# Altium PCB EECS498Converter.PcbDoc
Units mil, origin at the board's own origin, x right, y up, seen from the top; angles counter-clockwise.
Board outline 8000 x 5500 mil, 2 copper layers (Top Layer, Bottom Layer); 143 components, 79 nets, 280 pads, 0 vias.
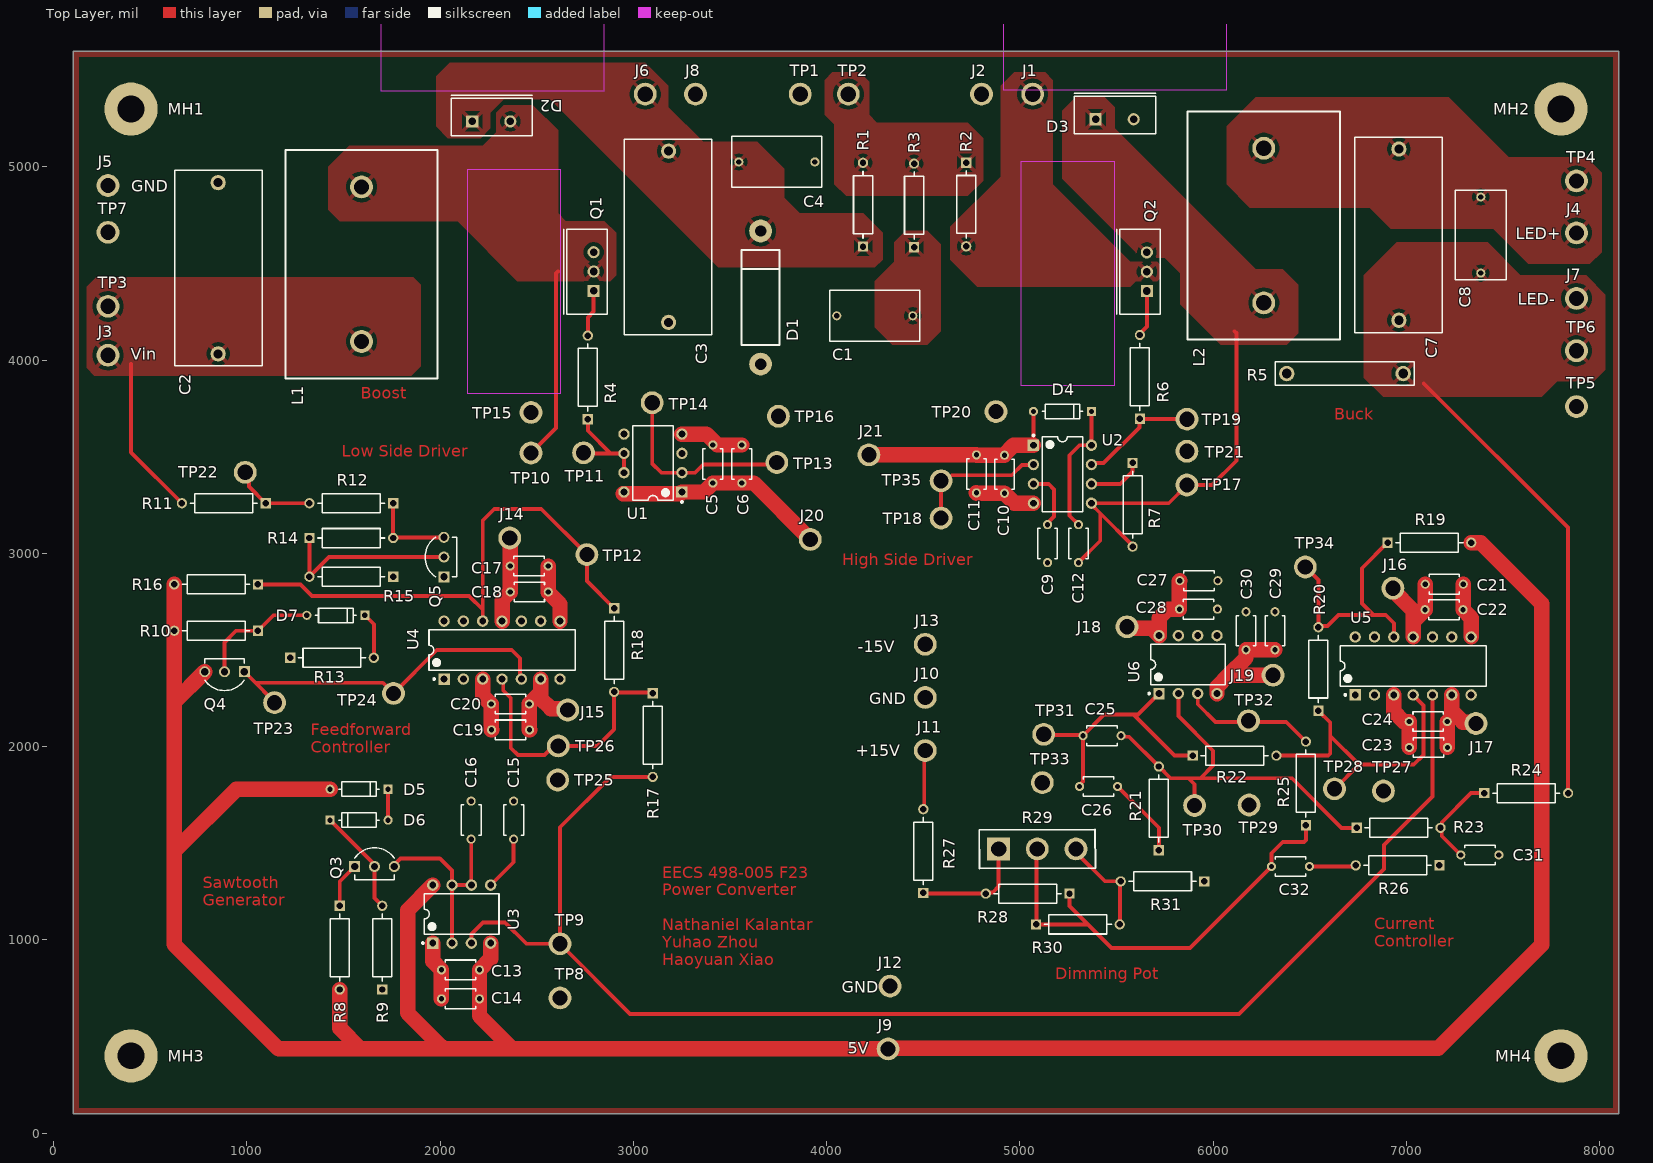
[diagram p0: Top Layer view]
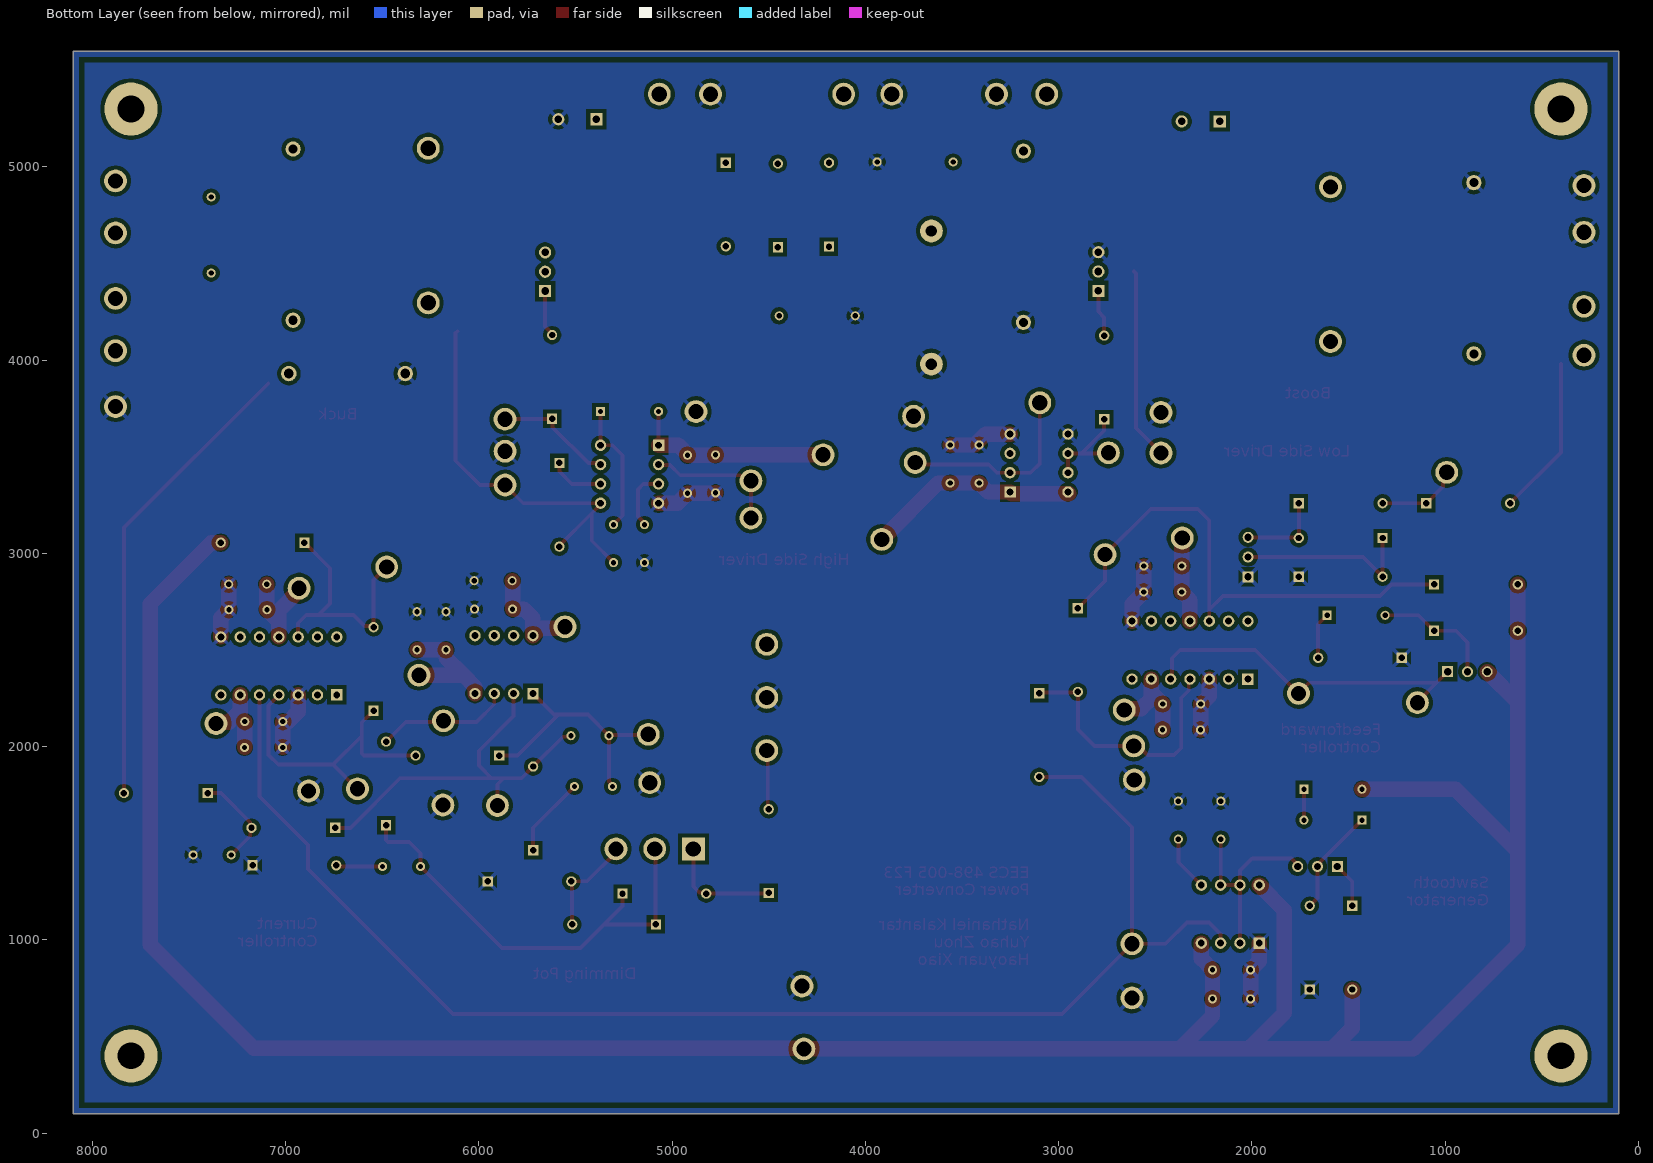
[diagram p1: Bottom Layer view, seen from below]
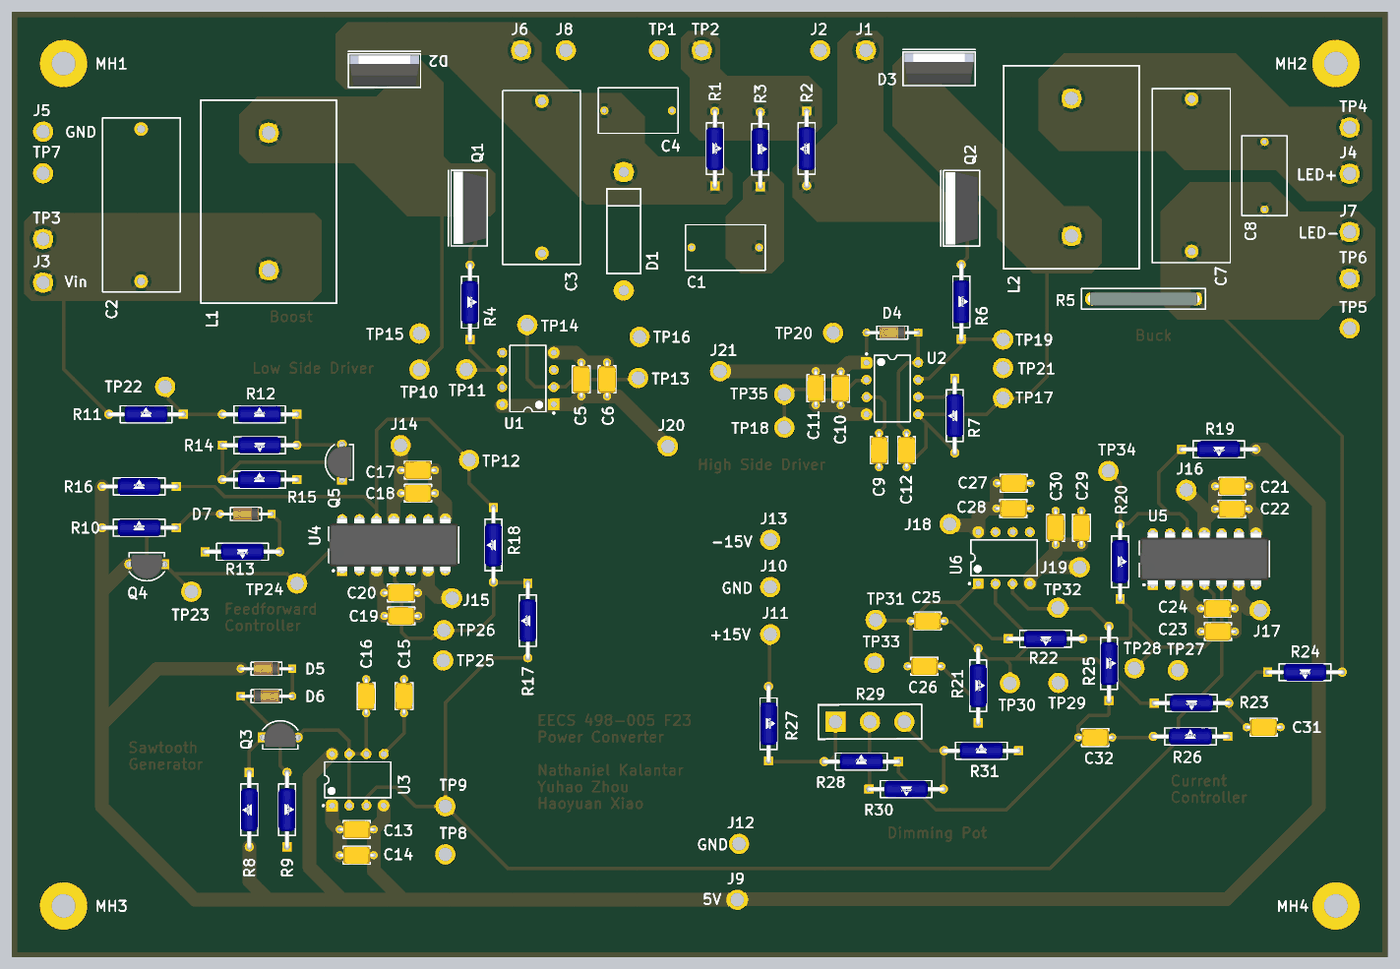
[diagram p2: 3D render of the assembled board from above, using the file's embedded part models]

## Layer stack, top to bottom
Top Layer: signal copper 1.4
Dielectric 1: dielectric 12.6, FR-4, Dk 4.8
Bottom Layer: signal copper 1.4

## Board outline
100,5600 8100,5600 8100,100 100,100

## Design rules (kind name [scope] priority, off if disabled: settings)
Clearance [All] p1: gap=10 ignorepadtopadclearanceinfootprint=FALSE except(0: Arc-Hole Track-Hole SMDPad-Hole THPad-Hole Via-Hole Fill-Hole Poly-Hole Region-Hole Text-Hole; 20: THPad-Poly)
Height [All] p1: minheight=0 maxheight=1100 prefheight=500
HoleSize [All] p1: absolutevalues=TRUE maxlimit=300 minlimit=10 maxpercent=80.000 minpercent=20.000
HoleToHoleClearance [All] p1: gap=8 allowstackedmicrovias=TRUE
MinimumAnnularRing [All] p1: minimumring=5
MinimumSolderMaskSliver [All] p1: minsoldermaskwidth=0
PasteMaskExpansion [All] p1: expansion=-99999 usepaste=FALSE
PlaneConnect [All] p1: planeconnectstyle=Relief reliefexpansion=20 reliefentries=4 reliefconductorwidth=20 reliefairgap=2
PolygonConnect [All] p1: connectstyle=Relief reliefconductorwidth=20 reliefentries=4 polygonreliefangle="45 Angle" airgapwidth=20
RoutingVias [All] p1: holewidth=28 width=50 viastyle="Through Hole" minholewidth=28 minwidth=50 maxholewidth=28 maxwidth=50
SilkToSolderMaskClearance [IsPad] p1: minsilkscreentomaskgap=0 clearancetoexposedcopper=TRUE
SolderMaskExpansion [All] p1: expansion=4 istentingtop=FALSE
Width [All] p1: maxlimit=100 minlimit=5 preferedwidth=15
23 further rules are at their usual default settings.

## Classes and differential pairs
component class "Dimming Circuit": R27 R28 R29 R30 R31
component class "Feedforward Controller": C17 C18 C19 C20 D7 J14 J15 Q4 Q5 Q6 R10 R11 R12 R13 R14 R15 R16 R17 R18 TP22 TP23 TP24 TP25 TP26 U4
component class EECS498Converter: C1 D1 J1 J2 J3 J4 J5 J6 J7 J8 J9 J10 J11 J12 J13 MH1 MH2 MH3 MH4 R1 R2 R3 TP1 TP2 TP3 TP4 TP5 TP6 TP7 TP8 TP9
component class "Constant Current Controller": C21 C22 C23 C24 C25 C26 C27 C28 C29 C30 C31 C32 J16 J17 J18 J19 R19 R20 R21 R22 R23 R24 R25 R26 TP27 TP28 TP29 TP30 TP31 TP32 TP33 U5 U6
component class "Buck Converter": C7 C8 C9 C10 C11 C12 D3 D4 J21 L2 Q2 R5 R6 R7 TP17 TP18 TP19 TP20 TP21 TP34 TP35 U2
component class "Boost Converter": C2 C3 C4 C5 C6 D2 J20 L1 Q1 R4 TP10 TP11 TP12 TP13 TP14 TP15 TP16 U1
component class "PWM Generator": C13 C14 C15 C16 D5 D6 Q3 R8 R9 U3

## Components (designator, comment, footprint, x,y, rotation, side; value= is the part's Value field where it differs from the comment)
C1 "1uF Film" FP-FILM-CAP-10mm 4249,4230 r180 top
C2 "10uF Film" FP-FILM-CAP-22.5mm 851,4476 r90 top
C3 "10uF Film" FP-FILM-CAP-22.5mm 3182,4639 r270 top
C4 "1uF Film" FP-FILM-CAP-10mm 3742,5026 r0 top
C5 "10nF Ceramic" FP-K15H5-MFG 3411,3463 r90 top
C6 "0.1uF Ceramic" FP-K15H5-MFG 3561,3463 r90 top
C7 "10uF Film" FP-FILM-CAP-22.5mm 6961,4650 r270 top
C8 "1uF Film" FP-FILM-CAP-10mm 7385,4647.85 r270 top
C9 "0.1uF Ceramic" FP-K15H5-MFG 5143,3051 r270 top
C10 "10nF Ceramic" FP-K15H5-MFG 4920,3410 r270 top
C11 "0.1uF Ceramic" FP-K15H5-MFG 4775,3412 r270 top
C12 "0.1uF Ceramic" FP-K15H5-MFG 5303,3051 r270 top
C13 "10nF Ceramic" FP-K15H5-MFG 2105,845 r180 top
C14 "0.1uF Ceramic" FP-K15H5-MFG 2105,695 r180 top
C15 "10nF Ceramic" FP-K15H5-MFG 2380,1620 r90 top
C16 "10nF Ceramic" FP-K15H5-MFG 2160,1620 r90 top
C17 "0.1uF Ceramic" FP-K15H5-MFG 2460.57,2935 r0 top
C18 "10nF Ceramic" FP-K15H5-MFG 2461,2801 r0 top
C19 "0.1uF Ceramic" FP-K15H5-MFG 2364,2087 r0 top
C20 "10nF Ceramic" FP-K15H5-MFG 2363,2221 r180 top
C21 "0.1uF Ceramic" FP-K15H5-MFG 7196,2841 r0 top
C22 "10nF Ceramic" FP-K15H5-MFG 7195,2709 r0 top
C23 "0.1uF Ceramic" FP-K15H5-MFG 7114,1996 r180 top
C24 "10nF Ceramic" FP-K15H5-MFG 7113,2130 r180 top
C25 "10nF Ceramic" FP-K15H5-MFG 5425,2057 r0 top
C26 "10nF Ceramic" FP-K15H5-MFG 5407,1794 r0 top
C27 "0.1uF Ceramic" FP-K15H5-MFG 5926,2859 r0 top
C28 "10nF Ceramic" FP-K15H5-MFG 5924,2712 r0 top
C29 "0.1uF Ceramic" FP-K15H5-MFG 6320,2600 r90 top
C30 "10nF Ceramic" FP-K15H5-MFG 6170,2600 r90 top
C31 "10nF Ceramic" FP-K15H5-MFG 7380,1440 r0 top
C32 "10nF Ceramic" FP-K15H5-MFG 6400,1380 r0 top
D1 "1N5363B-TP" 1N5363B-TP 3658,3980.02 r90 top
D2 "STPS1045D" STPS1045D 2166.15,5236 r0 top
D3 "STPS1045D" STPS1045D 5392,5247 r0 top
D4 "1N4148" FP-1N4148-MFG 5220,3735 r180 top
D5 "1N4148" FP-1N4148-MFG 1580,1780 r180 top
D6 "1N4148" FP-1N4148-MFG 1580,1620 r0 top
D7 "1N4148" FP-1N4148-MFG 1460,2680 r180 top
J1 "Connector Hole" "Connector Hole" 5066,5377 r0 top
J2 "Connector Hole" "Connector Hole" 4801,5377 r0 top
J3 "Connector Hole" "Connector Hole" 281,4026 r0 top
J4 "Connector Hole" "Connector Hole" 7880,4659 r0 top
J5 "Connector Hole" "Connector Hole" 281,4904 r0 top
J6 "Connector Hole" "Connector Hole" 3061,5377 r0 top
J7 "Connector Hole" "Connector Hole" 7880,4320 r0 top
J8 "Connector Hole" "Connector Hole" 3321,5377 r0 top
J9 "Connector Hole" "Connector Hole" 4318,436 r0 top
J10 "Connector Hole" "Connector Hole" 4510,2255 r0 top
J11 "Connector Hole" "Connector Hole" 4510,1980 r0 top
J12 "Connector Hole" "Connector Hole" 4328,761 r0 top
J13 "Connector Hole" "Connector Hole" 4510,2530 r0 top
J14 "Connector Hole" "Connector Hole" 2360,3080 r0 top
J15 "Connector Hole" "Connector Hole" 2660,2190 r0 top
J16 "Connector Hole" "Connector Hole" 6930,2820 r0 top
J17 "Connector Hole" "Connector Hole" 7360,2120 r0 top
J18 "Connector Hole" "Connector Hole" 5554.03,2620.55 r0 top
J19 "Connector Hole" "Connector Hole" 6310,2370 r0 top
J20 "Connector Hole" "Connector Hole" 3915,3073 r0 top
J21 "Connector Hole" "Connector Hole" 4218.43,3510.43 r0 top
L1 "Inductor" "Power Inductor" 1593,4497 r270 top
L2 "Inductor" "Power Inductor" 6262,4697 r270 top
MH1 "4-40 Mounting Hole" "4-40 Mounting Hole" 400,5300 r0 top
MH2 "4-40 Mounting Hole" "4-40 Mounting Hole" 7800,5300 r0 top
MH3 "4-40 Mounting Hole" "4-40 Mounting Hole" 400,400 r0 top
MH4 "4-40 Mounting Hole" "4-40 Mounting Hole" 7800,400 r0 top
Q1 "PHP18NQ11T,127" 1727-PHP18NQ11T,127-ND 2794,4459 r90 top
Q2 "PHP18NQ11T,127" 1727-PHP18NQ11T,127-ND 5657,4458 r90 top
Q3 "2N3906TF" 2N3906TF 1660,1394.96 r90 top
Q4 "2N3904" 2N3906TF 884,2373.04 r270 top
Q5 "2N3904" 2N3906TF 2004.04,2981.36 r180 top
R1 "0" FP-RLR07-MFG 4188,4805 r90 top
R2 "0" FP-RLR07-MFG 4722,4806 r270 top
R3 "1k" FP-RLR07-MFG 4452,4801 r90 top
R4 "100" FP-RLR07-MFG 2764,3911 r90 top
R5 "BR3FBR100" BR3FBR100 6381,3931 r0 top value=0.1
R6 "100" FP-RLR07-MFG 5621,3914 r90 top
R7 "10k" FP-RLR07-MFG 5583,3252 r270 top
R8 "2k" FP-RLR07-MFG 1480,960 r270 top
R9 "2k" FP-RLR07-MFG 1700,960 r90 top
R10 "10k" FP-RLR07-MFG 840,2600 r180 top
R11 "R1" FP-RLR07-MFG 880,3260 r180 top
R12 "R2" FP-RLR07-MFG 1540,3260 r180 top
R13 "Rclamp" FP-RLR07-MFG 1440,2460 r0 top
R14 "Ra" FP-RLR07-MFG 1540,3080 r0 top
R15 "Rb" FP-RLR07-MFG 1540,2880 r180 top
R16 "2.2k" FP-RLR07-MFG 840,2840 r180 top
R17 "1k" FP-RLR07-MFG 3100,2060 r270 top
R18 "100k" FP-RLR07-MFG 2900,2500 r270 top
R19 "2.2k" FP-RLR07-MFG 7119,3056 r0 top
R20 "300k" FP-RLR07-MFG 6545,2402 r90 top
R21 "1k" FP-RLR07-MFG 5719,1681 r90 top
R22 "15k" FP-RLR07-MFG 6111,1954 r0 top
R23 "100k" FP-RLR07-MFG 6960,1580 r0 top
R24 "100" FP-RLR07-MFG 7620,1760 r0 top
R25 "0" FP-RLR07-MFG 6480,1810 r90 top
R26 "1k" FP-RLR07-MFG 6954.46,1386 r180 top
R27 "500" FP-RLR07-MFG 4500,1460 r90 top
R28 "DNP" FP-RLR07-MFG 5040,1240 r180 top
R29 "PT01-D225D-B502" TRIM_PT01-D225D-B502 5090,1471 r0 top
R30 "DNP" FP-RLR07-MFG 5300,1080 r0 top
R31 "500" FP-RLR07-MFG 5738,1303 r180 top
TP1 "test point" "test point" 3863,5377 r0 top
TP2 "test point" "test point" 4112,5377 r0 top
TP3 "test point" "test point" 281,4279 r0 top
TP4 "test point" "test point" 7880,4928 r0 top
TP5 "test point" "test point" 7880,3760 r0 top
TP6 "test point" "test point" 7880,4049 r0 top
TP7 "test point" "test point" 281,4662 r0 top
TP8 "test point" "test point" 2620,700 r90 top
TP9 "test point" "test point" 2620,980 r90 top
TP10 "test point" "test point" 2470,3520 r0 top
TP11 "test point" "test point" 2742,3521 r0 top
TP12 "test point" "test point" 2759,2994 r90 top
TP13 "test point" "test point" 3742,3471 r90 top
TP14 "test point" "test point" 3097,3780 r90 top
TP15 "test point" "test point" 2470,3730 r0 top
TP16 "test point" "test point" 3750,3710 r90 top
TP17 "test point" "test point" 5864,3354 r90 top
TP18 "test point" "test point" 4592,3183 r90 top
TP19 "test point" "test point" 5865,3695 r90 top
TP20 "test point" "test point" 4876,3734 r90 top
TP21 "test point" "test point" 5864,3529 r90 top
TP22 "test point" "test point" 991,3420 r90 top
TP23 "test point" "test point" 1143,2228 r0 top
TP24 "test point" "test point" 1758,2276 r90 top
TP25 "test point" "test point" 2608,1828 r90 top
TP26 "test point" "test point" 2611,2004 r90 top
TP27 "test point" "test point" 6881,1771 r90 top
TP28 "test point" "test point" 6628,1782 r90 top
TP29 "test point" "test point" 6186,1698 r90 top
TP30 "test point" "test point" 5904,1696 r90 top
TP31 "test point" "test point" 5123,2064 r90 top
TP32 "test point" "test point" 6183,2134 r90 top
TP33 "test point" "test point" 5116,1814 r0 top
TP34 "test point" "test point" 6477,2930 r90 top
TP35 "test point" "test point" 4592,3376 r90 top
U1 "MCP1407" DIP8 3101,3468 r180 top
U2 "IR2125" DIP8 5220,3410 r0 top
U3 "TLC555" DIP8 2111.38,1133.65 r90 top
U4 "LM319N" LM319_DIP14 2320,2500 r90 top
U5 "LM319N" LM319_DIP14 7035,2418 r90 top
U6 "LM358" DIP8 5870,2425 r90 top

## Footprints (in the part's own frame and the unit in brackets; to place one, negate y for a bottom-side part, rotate by r counter-clockwise, add the part's x,y. Pads: shape width x height; smd on the part's side, far side on the other; paste and mask are expansions set on the pad)
1N5363B-TP [mm] "Zener Diode THT"
  round 3 hole 1.5: 1(0,0) 2(17.5,0)
  silkscreen extent 2.5,-2.5 15,2.5
2N3906TF [mm]
  rect 1.45x1.45 hole 0.95 paste-1000 mask+0: 1(-0.38,2.6)
  round 1.45 hole 0.95 paste-1000 mask+0: 2(-0.38,0) 3(-0.38,-2.6)
  silkscreen extent -2.09,-2.6 2.09,2.6, body extent -2.19,-3.42 2.19,3.42, height 0.25
"4-40 Mounting Hole" [mm]
  round 7 hole 3.5: 1(0,0)
1727-PHP18NQ11T,127-ND [mm] "N-Channel 110 V 18A (Tc) 79W (Tc) Through Hole TO-220AB"
  rect 1.6x1.6 hole 1: 1(-2.54,0)
  round 1.6 hole 1: 2(0,0) 3(2.54,0)
  silkscreen extent -5.59,-1.78 5.59,3.94, body extent -5.32,-1.57 5.37,3.24, height 21.05
BR3FBR100 [mil] "100 mOhms ?% 3W Through Hole Resistor Radial Current Sense, Flame Proof, Non-Inductive, Pulse Withstanding, Safety Metal Foil"
  round 80 hole 50: 1(0,0) 2(602,0)
  silkscreen extent -60,-60 660,60, body extent -25,-39 627,39, height 603
"Connector Hole" [mm]
  round 3 hole 2: 1(0,0)
DIP8 [mm] "8-Pin Plastic Dual In-Line Package (PDIP)"
  rect 1.5x1.5 hole 0.9: 1(-3.81,3.81)
  round 1.5 hole 0.9: 2(-3.81,1.27) 3(-3.81,-1.27) 4(-3.81,-3.81) 5(3.81,-3.81) 6(3.81,-1.27) 7(3.81,1.27) 8(3.81,3.81)
  silkscreen extent -3.94,-4.9 2.65,5.23, body extent -3.55,-4.9 3.55,4.9, height 4.32
FP-1N4148-MFG [mm]
  rect 1.2x1.2 hole 0.7 paste-1000 mask+0: 1(-3.813,0)
  round 1.2 hole 0.7 paste-1000 mask+0: 2(3.813,0)
  silkscreen extent -2.68,-0.95 2.68,0.95, body extent -4.51,-1.05 4.51,1.05, height 0.25
FP-FILM-CAP-10mm [mm]
  round 1.2 hole 0.7 paste-1000 mask+0: 1(-5,0) 2(5,0)
  silkscreen extent -5.9,-3.35 5.9,3.35
FP-FILM-CAP-22.5mm [mm]
  round 2 hole 1.2 paste-1000 mask+0: 1(-11.25,0) 2(11.25,0)
  silkscreen extent -12.8,-5.8 12.9,5.7
FP-K15H5-MFG [mm]
  round 1.2 hole 0.7 paste-1000 mask+0: 1(-2.5,0) 2(2.5,0)
  silkscreen extent -2,-1.3 2,1.3, body extent -3.2,-1.4 3.2,1.4, height 0.25
FP-RLR07-MFG [mm]
  rect 1.35x1.35 hole 0.85 paste-1000 mask+0: 1(-5.5,0)
  round 1.35 hole 0.85 paste-1000 mask+0: 2(5.5,0)
  silkscreen extent -4.43,-1.25 4.43,1.25, body extent -6.27,-1.35 6.27,1.35, height 0.25
LM319_DIP14 [mm] "Comparator General Purpose DTL, Open-Collector, Open-Emitter, RTL, TTL 14-PDIP"
  rect 1.5x1.5 hole 0.9: 1(-3.81,7.62)
  round 1.5 hole 0.9: 2(-3.81,5.08) 3(-3.81,2.54) 4(-3.81,0) 5(-3.81,-2.54) 6(-3.81,-5.08) 7(-3.81,-7.62) 8(3.81,-7.62) 9(3.81,-5.08) 10(3.81,-2.54) 11(3.81,0) 12(3.81,2.54) 13(3.81,5.08) 14(3.81,7.62)
  silkscreen extent -3.93,-9.6 2.65,9.6, body extent -4.25,-9.52 4.25,9.53, height 4.08
"Power Inductor" [mm] "Generic 2-pin Inductor Footprint"
  round 3 hole 2: 1(10.16,0) 2(-10.16,0)
  silkscreen extent -15,-10 15,10
STPS1045D [mm] "Diode 45 V 10A Through Hole TO-220AC"
  rect 1.6x1.6 hole 1: 1(0,0)
  round 1.6 hole 1: 2(5,0)
  silkscreen extent -2.79,-1.91 7.87,3.43, body extent -2.56,-1.68 7.64,2.82, height 19.69
"test point" [mm]
  round 3 hole 2: 1(0,0)
TRIM_PT01-D225D-B502 [mm]
  rect 3x3 hole 2: 1(-5.08,0)
  round 3 hole 2: 2(0,0.007) 3(5.08,0)
  silkscreen extent -7.63,-2.57 7.63,2.57

## Part data
C1 C4 C8: library part "1uf Capacitor", "CAP CER 1UF 50V X7R FILM", Capacitance=100nF, Case/Package=Dipped, Dielectric=X7R, Dielectric Material=Ceramic, Max Operating Temperature=125°C, Min Operating Temperature=-55°C, Package Quantity=1, Tolerance=10%, Voltage=50V, Construction=RADIAL, Depth=2.5mm, Diameter=500um, Height=4mm, Height - Seated (Max)=0.257inch, Lead Diameter=0.5mm, Lead Free="Lead Free", Lead Length=30mm, Lead Pitch=5mm, Lead/Base Style="Formed Leads", Length=4mm, Mount="Through Hole", Packaging="Tape and Reel", Radiation Hardening=No, RoHS Compliant=Yes, Series=K, Termination=Radial, Thickness=2.6mm, Voltage Rating=50V, Voltage Rating (DC)=50V, Weight=0.005644oz, Width=2.5mm
C2 C3 C7: library part "10uF Capacitor", "CAP CER 10UF 50V X7R FILM", Capacitance=100nF, Case/Package=Dipped, Dielectric=X7R, Dielectric Material=Ceramic, Max Operating Temperature=125°C, Min Operating Temperature=-55°C, Package Quantity=1, Tolerance=10%, Voltage=50V, Construction=RADIAL, Depth=2.5mm, Diameter=500um, Height=4mm, Height - Seated (Max)=0.257inch, Lead Diameter=0.5mm, Lead Free="Lead Free", Lead Length=30mm, Lead Pitch=5mm, Lead/Base Style="Formed Leads", Length=4mm, Mount="Through Hole", Packaging="Tape and Reel", Radiation Hardening=No, RoHS Compliant=Yes, Series=K, Termination=Radial, Thickness=2.6mm, Voltage Rating=50V, Voltage Rating (DC)=50V, Weight=0.005644oz, Width=2.5mm
C5 C10 C13 C15 C16 C18 C20 C22 C24 C25 C26 C28 C30 C31 C32: library part "10nF Capacitor", "CAP CER 10nF 50V X7R RADIAL", Capacitance=100nF, Case/Package=Dipped, Dielectric=X7R, Dielectric Material=Ceramic, Max Operating Temperature=125°C, Min Operating Temperature=-55°C, Package Quantity=1, Tolerance=10%, Voltage=50V, Construction=RADIAL, Depth=2.5mm, Diameter=500um, Height=4mm, Height - Seated (Max)=0.257inch, Lead Diameter=0.5mm, Lead Free="Lead Free", Lead Length=30mm, Lead Pitch=5mm, Lead/Base Style="Formed Leads", Length=4mm, Mount="Through Hole", Packaging="Tape and Reel", Radiation Hardening=No, RoHS Compliant=Yes, Series=K, Termination=Radial, Thickness=2.6mm, Voltage Rating=50V, Voltage Rating (DC)=50V, Weight=0.005644oz, Width=2.5mm
C6 C9 C11 C12 C14 C17 C19 C21 C23 C27 C29: library part "0.1uF Capacitor", "CAP CER 0.1UF 50V X7R RADIAL", Capacitance=100nF, Case/Package=Dipped, Dielectric=X7R, Dielectric Material=Ceramic, Max Operating Temperature=125°C, Min Operating Temperature=-55°C, Package Quantity=1, Tolerance=10%, Voltage=50V, Construction=RADIAL, Depth=2.5mm, Diameter=500um, Height=4mm, Height - Seated (Max)=0.257inch, Lead Diameter=0.5mm, Lead Free="Lead Free", Lead Length=30mm, Lead Pitch=5mm, Lead/Base Style="Formed Leads", Length=4mm, Mount="Through Hole", Packaging="Tape and Reel", Radiation Hardening=No, RoHS Compliant=Yes, Series=K, Termination=Radial, Thickness=2.6mm, Voltage Rating=50V, Voltage Rating (DC)=50V, Weight=0.005644oz, Width=2.5mm
D1: "Zener Diode 30V 5W THT", Manufacturer="Fairchild Semiconductor", Operating and Storage Temperature Range="-65 to 200 degC", PartNumber=1N4742A, Test Current IZ (mA)=21, Tolerance=5%, ComponentLink1Description="Manufacturer URL", ComponentLink1URL=http://www.fairchildsemi.com/, ComponentLink2Description=Datasheet, ComponentLink2URL=http://www.fairchildsemi.com/ds/1N/1N4744A.pdf, ComponentLink3Description="Package Specification", ComponentLink3URL=http://www.fairchildsemi.com/dwg/DO/DO41A.pdf, DatasheetVersion="Rev. H3", IR (uA)=5, Mounting Technology="Through Hole", PackageDescription="2-Pin Axial leaded, Body 2.72 x 5.2 mm, Lead Spread 25.4 mm", PackageReference=DO-41-2, PackageVersion="Rev. 2", PD (W)=1, RoHS=TRUE, VZ (Max.) (V)=12.6, VZ (Min.) (V)=11.4, ZZ (Max) (ohm)=8
D2 D3: "Diode 45 V 10A Through Hole TO-220AC", Supplier Part Number 1=511-STPS1045D, Supplier 1=Mouser
D4 D5 D6 D7: "DIODE GEN PURP 100V 200MA DO35", Average Rectified Current=200mA, Capacitance=4pF, Case/Package=DO-35, Current=4A, Forward Current=300mA, Forward Voltage=1V, Max Forward Surge Current (Ifsm)=1A, Max Operating Temperature=175°C, Max Power Dissipation=500mW, Max Repetitive Reverse Voltage (Vrrm)=100V, Max Reverse Current=5uA, Min Operating Temperature=-65°C, Package Quantity=2000, Contact Plating=Tin, Current Rating=200mA, Diameter=1.91mm, Element Configuration=Single, Height=4.56mm, Lead Free="Lead Free", Length=4.56mm, Max Reverse Voltage (DC)=100V, Max Surge Current=4A, Mount="Through Hole", Number of Pins=2, Output Current=200mA, Outside Diameter=1.85mm, Packaging=Bulk, Peak Non-Repetitive Surge Current=4A, Polarity=Standard, Power Dissipation=500mW, Radiation Hardening=No, REACH SVHC="No SVHC", Recovery Time=4ns, Reverse Recovery Time=4ns, Reverse Voltage=100V, Series=-, Voltage=100V, Voltage Rating (DC)=100V, Weight=0.01lb, Width=1.91mm
L1 L2: Case Code (Imperial)=1210, Case Code (Metric)=3225, Current Rating=180mA, DC Resistance (DCR)=1.6R, Inductance=10uH, Inductance Tolerance=10%, Max Operating Temperature=125°C, Package Quantity=2000, Ratings=AEC-Q200, Resistor Type=Wirewound, Self Resonant Frequency=25MHz, Test Frequency=1MHz, Case/Package=1210, Contact Plating=Tin, Core Material=Ferrite, DC Current=180mA, Depth=2.8mm, Height=2.1mm, Height - Seated (Max)=0.083inch, Lead Free="Lead Free", Length=3.5mm, Max DC Current=180mA, Military Standard=Not, Mount="Surface Mount", Number of Pins=2, Packaging="Tape and Reel", Q Factor=27, Radiation Hardening=No, Rated Current-Max=180mA, REACH SVHC="No SVHC", RoHS Compliant=Yes, Series=SIMID, Series Resistance=1.6R, Shielding=Unshielded, Termination=SMD/SMT, Tolerance=10%, Weight=0.001764oz, Width=0.098inch
Q1 Q2: "N-Channel 110 V 18A (Tc) 79W (Tc) Through Hole TO-220AB", Supplier Part Number 1=1727-PHP18NQ11T,127-ND, Supplier 1=Digi-Key
Q3: "2N3906TF Small Signal Bipolar Transistor, 0.2A I(C), 40V V(BR)CEO, 1-Element, PNP, Silicon, TO-92", Case/Package=TO-92, Collector Base Voltage (VCBO)=-40V, Collector Emitter Saturation Voltage=-400mV, Current Rating=-200mA, Emitter Base Voltage (VEBO)=-5V, Frequency=250MHz, Manufacturer Lifecycle Status=ACTIVE, Max Breakdown Voltage=160V, Max Junction Temperature (Tj)=150°C, Max Power Dissipation=625mW, Min Operating Temperature=-55°C, Collector Emitter Breakdown Voltage=-40V, Collector Emitter Voltage (VCEO)=-40V, Element Configuration=Single, Gain Bandwidth Product=250MHz, Height=5.33mm, hFE Min=100, Lead Free="Lead Free", Length=5.2mm, Lifecycle Status=Production, Max Collector Current=-200mA, Max Frequency=250MHz, Max Operating Temperature=150°C, Mount="Through Hole", NexarPartId=84408866, Number of Elements=1, Number of Pins=3, Packaging="Tape and Reel", Polarity=PNP, Power Dissipation=625mW, Radiation Hardening=No, REACH SVHC="No SVHC", RoHS=Compliant, Schedule B=8541210080, Transition Frequency=250MHz, Voltage Rating (DC)=-40V, Weight=240mg, Width=4.19mm
Q4 Q5: "General Purpose Transistor, NPN Silicon, 200 mA, 60 V, -55 to 150 degC, 3-Pin TO-92, RoHS, Bulk", Collector- Base Voltage VCBO=60V, Collector- Emitter Voltage VCEO Max=40V, Collector-Emitter Saturation Voltage=0.3V, Emitter- Base Voltage VEBO=6V, Manufacturer=ONSemiconductor, Maximum DC Collector Current=0.2A, Maximum Operating Temperature=+150C, Maximum Power Dissipation=625mW, Minimum Operating Temperature=-65C, Package / Case=TO-92-3(TO-226), Package Description="3-Pin Transistor Outline, Body 4.825 x 3.685 mm, Pitch 1.27 mm", Package Reference=TO-92-3-29-11, Brand=ONSemiconductor, Configuration=Single, Datasheet URL=https://datasheet.ciiva.com/4725/2n3903-d-285841-4725808.pdf, Datasheet Version="Rev. 8, 08/2012", DC Collector/Base Gain hfe Min=60, Factory Pack Quantity=5000, Gain Bandwidth Product fT=270MHz, Manufacturer URL=http://www.onsemi.com/, Mounting Style=ThroughHole, Mounting Technology=ThroughHole, Packaging=Bulk, Product Category=BipolarTransistors-BJT, RoHS=Details, Transistor Polarity=NPN
R1 R2 R3 R4 R6 R7 R8 R9 R10 R11 R12 R13 R14 R15 R16 R17 R18 R19 R20 R21 R22 R23 R24 R25 R26 R27 R28 R30 R31: library part Resistor, "Resistor, ± 1%, 250 mW, Axial Leaded, Metal Film, Military Reliability", Case/Package=Axial, Max Operating Temperature=150°C, Max Power Dissipation=250mW, Min Operating Temperature=-65°C, Resistance=100kΩ, Temperature Coefficient=100ppm/°C, Tolerance=1%, Voltage Rating=250V, Composition="Metal Film", Contact Plating="Lead, Tin", Diameter=2.29mm, Failure Rate=0.001%, Features="Military, Moisture Resistant, Weldable", Height=2.5mm, Lead Diameter=640µm, Lead Free="Contains Lead", Lead Length=38.1mm, Length=7.62mm, Military Standard=MIL-PRF-39017, NexarPartId=39453770, Number of Terminations=2, Packaging=Bulk, Power Rating=250mW, Radiation Hardening=No, REACH SVHC=Unknown, RoHS=Non-Compliant, Schedule B="8533210090, 8533210090|8533210090, 8533210090|8533210090|8533210090, 8533210090|8533210090|8533210090|8533210090", Termination=Axial, Voltage Rating (DC)=250V, Width=2.29mm, Wire/Cable Diameter=50.8µm
R5: "100 mOhms ±1% 3W Through Hole Resistor Radial Current Sense, Flame Proof, Non-Inductive, Pulse Withstanding, Safety Metal Foil", Supplier Part Number 1=7170987, Supplier 1="Future Electronics"
R29: Package=None, Availability=Unavailable, MP=PT01-D225D-B502, Price=None
U1: "6A High-Speed Power MOSFET Drivers, Non Inverting, Extended Temperature", Code_JEDEC=MS-001, DatasheetVersion="revA, Dec-2006", PackageDescription="8-Lead Plastic Dual In-Line (P) - 300 mil Body [PDIP]", PackageReference=PDIP300-P8, PackageVersion="revBB, Aug-2009"
U2: "High-Side Gate Driver IC Non-Inverting 8-PDIP", Supplier Part Number 1=70017143, Supplier 1="Allied Electronics"
U3: "IC OSC SGL TIMER 2.1MHZ 8-SOIC", Case/Package=SOIC, Current Rating=250A, Frequency=2.1MHz, High Level Output Current=-10mA, Low Level Output Current=100mA, Max Operating Temperature=125°C, Max Power Dissipation=725mW, Max Supply Voltage=15V, Min Operating Temperature=-40°C, Min Supply Voltage=2V, Operating Supply Current=360uA, Package Quantity=2500, Quiescent Current=250uA, Height=1.58mm, Lead Free="Lead Free", Length=4.9mm, Mount="Surface Mount", Number of Channels=1, Number of Pins=8, Number Of Timers/Counters=1, Packaging="Tape and Reel", Power Dissipation=725mW, Radiation Hardening=No, REACH SVHC="No SVHC", Termination=SMD/SMT, Weight=0.002561oz, Width=3.91mm
U4 U5: "High Speed Dual Comparator, 14-pin MDIP", Manufacturer="Texas Instruments", Package Reference=NFF0014A, PackageTopMarking=NSUZXYYTTE#*LM319N, PowerWise=N, Code_JEDEC=MS-001-AA, ComponentLink1Description="Datasheet URL", ComponentLink1URL=http://www.ti.com/general/docs/lit/getliterature.tsp?genericPartNumber=LM319-N&fileType=pdf, CompType=Amplifiers, PackageDescription="MDIP, .750 x .250 x.130in, 14 Lead, .100in Pitch", PinCount=14, RoHS=N
U6: "Low Power Dual Operational Amplifier, 8-pin MDIP, Pb-Free", Manufacturer="Texas Instruments", Package Reference=P0008A, PackageTopMarking=NSUZXYTTE#*LM*358N, PowerWise=N, Code_JEDEC=MS-001-BA, ComponentLink1Description="Datasheet URL", ComponentLink1URL=http://www.ti.com/general/docs/lit/getliterature.tsp?genericPartNumber=LM358-N&fileType=pdf, CompType=Amplifiers, PackageDescription="MDIP, .365 x .250 x .130in, 8 Lead, .100in Pitch", PinCount=8, RoHS=Y

## Nets (pads, with @x,y where several pads share a name; then routed paths per layer and width w, separated by ;. In a path a pad name is that pad's centre, name@x,y a point inside that pad or via, vN(x,y) a via of type N, cw(c..) or ccw(c..) an arc to the next point about the centre after c; other vN are vias at no path point)
5V: C13.1 C14.1 D5.2 J9.1 Q4.3 R8.2 R10.2 R16.2 R19.2 U3.4 U3.8 | length 14764.4
  Top Layer w80: R16.2 R10.2 623.46,2229.83 ; 632.26,1467.26 945,1780 D5.2 ; Q4.3 623.46,2229.83 ; R8.2 1480,544 1588,436 ; U3.8 1831,1153.28 1831,623 2007,447 2007,436 ; U3.4 2261.38,902.95 C13.1 C14.1 2203.43,606.57 2374,436 ; J9.1 2374,436 ; J9.1@4320,440 7166,440 7700,974 7700,2740 7384,3056 R19.2 ; 623.46,2229.83 623.46,976.54 1164,436 1588,436 ; 1588,436 2007,436 ; 2007,436 2374,436
15V: J11.1 R27.2 | length 307.6
  Top Layer w20: R27.2 4505,1681.54 4505,1975 J11.1
-15V: J13.1
GND: C1.2 C2.2 C3.2 C4.2 C5.2 C6.2 C9.2 C10.2 C11.2 C13.2 C14.2 C15.2 C16.2 C17.2 C18.2 C19.1 C20.2 C21.2 C22.2 C23.2 C24.2 C27.2 C28.2 C29.2 C30.2 C31.2 D1.1 D3.2 J2.1 J5.1 J8.1 J10.1 J12.1 Q1.3 Q5.1 R5.1 R9.1 R13.1 R15.1 R26.1 R31.1 TP1.1 TP5.1 TP7.1 TP8.1 TP15.1 TP16.1 TP20.1 TP21.1 TP25.1 TP27.1 TP29.1 TP33.1 U1.4 U1.5 U2.4 U3.1 U4.3 U4.8 U5.3 U5.8 | length 2162.1
  Top Layer w80: U3.1 1961.38,890.2 C13.2 C14.2 ; U4.3 2220,2261.57 C20.2@2261.57,2220 ; C20.2 2264.57,2088 C19.1 ; C18.2@2558.43,2800 2620,2738.43 U4.8 ; C17.2 2559,2801.43 C18.2 ; U1.4 3377.71,3618 3434.29,3561.43 C6.2 ; C11.2 4777,3311.57 C10.2 4971.57,3260 U2.4 ; U5.3 6935,2181 6986,2130 C24.2 7015.57,2129 C23.2 ; C21.2 7294.43,2710 C22.2 7335,2667.43 U5.8
NetC1_1: C1.1 R3.1
NetC2_1: C2.1 J3.1 L1.1 R11.2 TP3.1 | length 829.1
  Top Layer w20: 400,3980 400,3523.46 R11.2
NetC3_1: C3.1 C4.1 D1.2 D2.1 J6.1 R1.1
NetC7_1: C7.1 C8.1 J4.1 L2.2 TP4.1
NetC7_2: C7.2 C8.2 J7.1 R5.2 R24.2 TP6.1 | length 2429.2
  Top Layer w20: 7090,3880 7836.54,3133.46 R24.2
NetC9_1: C9.1 U2.3 | length 315.3
  Top Layer w20: U2.3 5149,3360 5177,3332 5177,3190.8 5143,3156.8 C9.1
NetC12_1: C12.1 D4.1 U2.8 | length 687.2
  Top Layer w20: C12.1 5257,3195.43 5257,3508 5309,3560 U2.8 5370.06,3560.06 5370.06,3734.94 D4.1
NetC12_2: C12.2 D3.1 L2.1 Q2.3 R7.2 TP17.1 U2.5 | length 2130.5
  Top Layer w20: C12.2 5416,3065.57 5416,3208.23 ; R7.2 5583,3041.23 5416,3208.23 ; 6110,4150 6120,4140 6120,3480 5994,3354 TP17.1 5770,3260 U2.5 5370,3254.23 5416,3208.23
NetC15_1: C15.1 U3.5 | length 287.1
  Top Layer w20: U3.5 2380,1402.28 C15.1
NetC16_1: C16.1 Q3.3 U3.2 U3.6 U3.7 | length 1062.2
  Top Layer w20: Q3.3 1762.36,1390.04 1778.58,1406.25 1778.58,1406.58 1794,1422 1998,1422 2061.38,1358.62 U3.7 ; U3.2 U3.7 ; C16.1 2160.69,1520.89 2160.69,1284.34 U3.6 U3.7
NetC25_1: C25.1 C26.1 R22.1 TP31.1 U6.1 | length 1358.8
  Top Layer w20: TP31.1 5126.5,2060.5 5323.07,2060.5 C25.1 ; C26.1 5308.57,1801.37 5326.57,1819.37 C25.1 ; U6.1 5611,2166 5588,2166 ; R22.1@5897.23,1956.77 R22.1 5800,1954 5588,2166 ; C25.1 5435.57,2166 5588,2166
NetC25_2: C25.2 R21.2 R23.1 TP30.1 U6.2 | length 2110.9
  Top Layer w20: C25.2 5528.64,2051.79 5564.75,2051.79 R21.2 5779.54,1837 5873,1837 ; U6.2 5820,2159 6000,1979 6000,1902 5935,1837 ; TP30.1 5904,1806 5873,1837 ; R23.1 6665,1580 6408,1837 5935,1837 ; 5873,1837 5935,1837
NetC26_2: C26.2 R21.1 | length 418
  Top Layer w20: C26.2 5719,1580.43 R21.1
NetC31_1: C31.1 R23.2 R24.1 | length 497.6
  Top Layer w20: C31.1 7182.88,1538.7 7182.88,1573.66 R23.2 7182.88,1586.34 7182.88,1607.88 7335,1760 R24.1
NetC32_1: C32.1 R25.1 R28.1 R29.2 R30.1 | length 2386.4
  Top Layer w20: R29.2 5086.73,1467.99 5086.73,1083.27 R30.1 5348,1080 5350,1082 ; R28.1 5256.54,1175.46 5350,1082 ; R25.1 6480,1517.46 6469.46,1506.93 6360,1506.93 6301.57,1448.5 C32.1 5880.57,959 5473,959 5350,1082
NetC32_2: C32.2 R26.2 | length 242
  Top Layer w20: C32.2 6731.93,1380 R26.2
NetD2_2: D2.2 L1.2 Q1.2 TP10.1 | length 998
  Top Layer w20: TP10.1 2600,3650 2600,4450 2610,4460
NetD5_1: D5.1 D6.2 | length 160
  Top Layer w20: D6.2 D5.1
NetD6_1: D6.1 Q3.2 R9.2 | length 555.4
  Top Layer w20: D6.1 1660,1389.88 Q3.2 1660,1216.54 R9.2
NetD7_1: D7.1 R13.2 | length 239.2
  Top Layer w20: D7.1 1656.54,2633.58 R13.2
NetD7_2: D7.2 Q4.2 R10.1 | length 635.9
  Top Layer w20: Q4.2 884,2540 944,2600 R10.1 1136.54,2680 D7.2
NetJ1_1: J1.1 Q2.2 R2.2
NetMH1_1: MH1.1
NetMH2_1: MH2.1
NetMH3_1: MH3.1
NetMH4_1: MH4.1
NetQ1_1: Q1.1 R4.2 | length 243.9
  Top Layer w20: R4.2 2764,4222 2794,4252 Q1.1
NetQ2_1: Q2.1 R6.2 | length 242.4
  Top Layer w20: R6.2 5621,4138.54 5657,4174.54 Q2.1
NetQ3_1: Q3.1 R8.1 | length 235.6
  Top Layer w20: R8.1 1480,1302.36 Q3.1
NetQ4_1: Q4.1 TP23.1 TP24.1 U4.5 | length 1845.2
  Top Layer w20: Q4.1 1043.36,2331 ; TP23.1@1104,2231 TP23.1@1104,2244 ; TP23.1@1127,2227 1127,2247.36 1043.36,2331 ; U4.5 2412.53,2357.47 2412.53,2457.47 2370,2500 1982,2500 TP24.1 1703,2331 1043.36,2331
NetQ5_2: Q5.2 R14.1 R15.2 | length 937.5
  Top Layer w20: R14.1 R15.2 1424.83,2981.36 Q5.2
NetQ5_3: Q5.3 R12.1 R14.2 | length 444
  Top Layer w20: R12.1 R14.2 1758.4,3081.86 2017.14,3081.86 Q5.3
NetR1_2: R1.2 R2.1 R3.2 TP2.1
NetR4_1: R4.1 TP11.1 U1.6 U1.7 | length 535.2
  Top Layer w20: TP11.1 2745,3518 2881,3518 ; R4.1 2764,3635 2881,3518 ; U1.7 U1.6 2881,3518
NetR6_1: R6.1 TP19.1 U2.7 | length 619.3
  Top Layer w20: U2.7 5377.47,3467.47 5433.47,3467.47 5618.61,3652.61 5618.61,3695.07 R6.1 5622.23,3696.23 5863.77,3696.23 TP19.1
NetR7_1: R7.1 U2.6 | length 284
  Top Layer w20: U2.6 5519,3360 5583,3424 R7.1
NetR11_1: R11.1 R12.2 TP22.1 | length 430.6
  Top Layer w20: TP22.1 1009.77,3401.23 1009.77,3346.76 R11.1 R12.2
NetR16_1: R16.1 R18.1 TP12.1 U4.12 | length 2734.8
  Top Layer w20: R16.1 1276.56,2840 1336.56,2780 2150,2780 2220,2710 ; U4.12 2220,2710 ; R18.1 2759,2857.54 TP12.1 2523,3230 2280,3230 2220,3170 2220,2710
NetR17_1: R17.1 R18.2 TP26.1 U4.4 | length 1376.4
  Top Layer w20: U4.4 2326.53,2343.47 2326.53,2290.47 2365,2252 2365,1994 2402,1957 2540,1957 2587,2004 TP26.1 2814,2004 2900,2090 R18.2 2903.46,2280 3096.54,2280 R17.1
NetR17_2: R17.2 TP9.1 U3.3 U5.5 | length 7497.9
  Top Layer w20: U3.3 2161.38,1031.38 2221,1091 2335.81,1091 2446.81,980 TP9.1 ; R17.2 2880.46,1843.46 2620,1583 TP9.1 ; U5.5 7135,1743 6884,1492 6884,1367 6134,617 2983,617 TP9.1
NetR19_1: R19.1 R20.2 TP34.1 U5.12 | length 1298.6
  Top Layer w20: TP34.1 6545,2862 R20.2 6551.34,2624.88 6591.88,2624.88 6648,2681 6830,2681 ; R19.1 6770,2923.54 6770,2741 6830,2681 ; U5.12 6935,2639 6893,2681 6830,2681
NetR20_1: R20.1 R22.2 TP28.1 U5.4 | length 1604.7
  Top Layer w20: R22.2 6594.28,1954 6606,1965.72 6606,2055.54 ; R20.1 6606,2124.46 6606,2055.54 ; TP28.1 6629.54,1782 6754.54,1907 ; U5.4 7089,2214 7089,1958 7038,1907 6754.54,1907 ; 6606,2055.54 6754.54,1907
NetR25_2: R25.2 TP32.1 U6.3 | length 694.1
  Top Layer w20: U6.3 5920,2220 6012,2128 6378.54,2128 R25.2@6479.26,2027.27
NetR27_1: R27.1 R28.2 R29.1 | length 600.8
  Top Layer w20: R27.1 4503.19,1240.27 4823.19,1240.27 R28.2 4829.81,1246.34 4859.34,1246.34 4890,1277 R29.1
NetR29_3: R29.3 R30.2 R31.2 | length 534.9
  Top Layer w20: R29.3 5290,1452.93 5439.46,1303.46 5520,1303.46 5518.27,1301.73 5518.27,1081.73 R30.2
NetTP13_1: TP13.1 TP14.1 U1.2 | length 1000.8
  Top Layer w20: TP14.1 3097,3466 3145,3418 U1.2 3318,3418 3361,3461 3732,3461 TP13.1
NetTP18_1: TP18.1 TP35.1 U2.2 | length 705.8
  Top Layer w20: TP18.1 TP35.1 4618.55,3376 4647.55,3405 4958,3405 5010.47,3457.47 5067.47,3457.47 U2.2
NetU1_3: U1.3
NetU4_1: U4.1
NetU4_2: U4.2
NetU4_7: U4.7
NetU4_9: U4.9
NetU4_10: U4.10
NetU4_13: U4.13
NetU4_14: U4.14
NetU5_1: U5.1
NetU5_2: U5.2
NetU5_7: U5.7
NetU5_9: U5.9
NetU5_10: U5.10
NetU5_13: U5.13
NetU5_14: U5.14
NetU6_5: U6.5
NetU6_6: U6.6
NetU6_7: U6.7
OUTLINE_B: 
OUTLINE_T: 
V_CC+: C21.1 C22.1 J16.1 U5.11 | length 515
  Top Layer w80: J16.1 6930,2809.69 7035,2704.69 7035,2646.43 ; U5.11 7035,2646.43 ; C22.1@7096.57,2708 7035,2646.43 ; C22.1 7097.57,2710 C21.1
V_CC-: C23.1 C24.1 J17.1 U5.6 | length 404.8
  Top Layer w80: C24.1 7211.43,1997 C23.1 ; 7235,2149.57 7235,2185 ; U5.6 7235,2185 ; J17.1 7352.71,2127.29 7292.71,2127.29 7235,2185
V_FF+: C17.1 C18.1 J14.1 U4.11 | length 447.3
  Top Layer w80: U4.11 2320,2758.43 C18.1@2361.57,2800 ; J14.1 2362.15,3077.85 C17.1 2362.57,2934.57 C18.1
V_FF-: C19.2 C20.1 J15.1 U4.6 | length 483.5
  Top Layer w80: C20.1@2460.43,2222 2520,2281.57 ; C20.1 2461.43,2088 C19.2 ; U4.6 2520,2281.57 ; J15.1 2652.71,2197.29 2572.71,2197.29 2520,2250 2520,2281.57
V_HI: C10.1 C11.1 D4.2 J21.1 U2.1 | length 1051.6
  Top Layer w20: D4.2 5069.94,3734.94 5069.94,3560.06 U2.1
  Top Layer w80: J21.1 C11.1 4777,3508.43 C10.1 4920,3513.14 4966.86,3560 U2.1
V_LO: C5.1 C6.1 J20.1 U1.1 U1.8 | length 1113
  Top Layer w80: U1.8@2946,3308.47 3241.47,3308.47 U1.1 3364.43,3318 C5.1 C6.1 3623.43,3364.57 J20.1
V_OP+: C27.1 C28.1 J18.1 U6.8 | length 547.8
  Top Layer w80: J18.1 5561.32,2613.26 5681.74,2613.26 U6.8 5720,2665.14 5766.86,2712 C28.1 5825.57,2857 C27.1
V_OP-: C29.1 C30.1 J19.1 U6.4 | length 668.7
  Top Layer w80: U6.4 6020,2310 6080,2370 ; J19.1 6080,2370 ; C29.1 C30.1 6170,2460 6080,2370

## Polygon pours and split planes (outlines as drawn)
OUTLINE_B on Bottom Layer "OUTLINE_B_L02_P049" (solid, pour order 49): 100,100 8100,100 8100,5600 8070,5600 8070,130 100,130
OUTLINE_B on Bottom Layer "OUTLINE_B_L02_P048" (solid, pour order 48): 100,5600 8100,5600 8100,5570 130,5570 130,100 100,100
GND on Bottom Layer "GND_L02_P041" (solid, pour order 41): 160,5540 8040,5540 8040,160 160,160
OUTLINE_T on Top Layer "OUTLINE_T_L01_P047" (solid, pour order 47): 100,100 8100,100 8100,5600 8070,5600 8070,130 100,130
OUTLINE_T on Top Layer "OUTLINE_T_L01_P046" (solid, pour order 46): 100,5600 8100,5600 8100,5570 130,5570 130,100 100,100
NetC7_1 on Top Layer "NETC7_1_L01_P040" (solid, pour order 40): 6070,5210 6220,5360 7220,5360 7530,5050 7940,5050 7940,5040 8010,4970 8010,4560 7950,4500 7630,4500 7450,4680 6920,4680 6810,4790 6190,4790 6070,4910
NetC3_1 on Top Layer "NETC3_1_L01_P039" (solid, pour order 39): 2570,5350 2330,5350 2260,5280 2260,5200 2210,5150 2040,5150 1980,5210 1980,5470 2050,5540 3060,5540 3180,5420 3180,5310 3360,5130 3640,5130 3780,4990 3780,4840 3860,4760 4190,4760 4290,4660 4290,4520 4250,4480 3440,4480
NetC2_1 on Top Layer "NETC2_1_L01_P038" (solid, pour order 38): 1860,4430 1900,4390 1900,3970 1850,3920 210,3920 170,3960 170,4380 220,4430
NetC7_2 on Top Layer "NETC7_2_L01_P037" (solid, pour order 37): 7780,3890 7970,3890 8030,3950 8030,4340 7930,4440 7590,4440 7420,4610 6950,4610 6780,4440 6780,3910 6880,3810 7700,3810
NetD2_2 on Top Layer "NETD2_2_L01_P036" (solid, pour order 36): 2290,5280 2290,5180 2220,5110 1530,5110 1420,5000 1420,4780 1480,4720 1750,4720 2090,4720 2400,4410 2880,4410 2910,4440 2910,4660 2850,4720 2650,4720 2610,4760 2610,5190 2480,5320 2330,5320
NetC12_2 on Top Layer "NETC12_2_L01_P035" (solid, pour order 35): 6220,4470 6360,4470 6440,4390 6440,4140 6380,4080 6040,4080 5830,4290 5830,4450 5750,4530 5620,4530 5600,4550 5600,4560 5220,4940 5220,5290 5290,5360 5440,5360 5490,5310 5490,5200
NetJ1_1 on Top Layer "NETJ1_1_L01_P034" (solid, pour order 34): 5170,4910 5170,5450 5130,5490 4970,5490 4900,5420 4900,4950 4640,4690 4640,4520 4780,4380 5570,4380 5600,4410 5710,4410 5730,4430 5730,4490 5710,4510 5570,4510
NetR1_2 on Top Layer "NETR1_2_L01_P033" (solid, pour order 33): 4260,5230 4220,5270 4220,5440 4170,5490 4030,5490 3990,5450 3990,5270 4040,5220 4040,4910 4100,4850 4730,4850 4810,4930 4810,5150 4730,5230
NetC1_1 on Top Layer "NETC1_1_L01_P032" (solid, pour order 32): 4350,4610 4410,4670 4520,4670 4590,4600 4590,4150 4520,4080 4340,4080 4250,4170 4250,4410 4350,4510

## Keep-outs
Top Layer:
  region: 5005,5027 5005,3870 5490,3870 5490,5027
  region: 6070,5885 4913,5885 4913,5400 6070,5400
  region: 2140,4987 2140,3830 2625,3830 2625,4987
  region: 2850,5880 1693,5880 1693,5395 2850,5395

## Other copper
Top Layer:
  text "Boost" at 1590,3800 h60
  text "Buck" at 6626,3691 h60
  text "Low Side Driver" at 1490,3500 h60
  text "High Side Driver" at 4081,2938.99 h60
  text "Feedforward / Controller" at 1330,1970 h60
  text "Sawtooth / Generator" at 772,1178 h60
  text "Current / Controller" at 6833,965 h60
  text "EECS 498-005 F23 / Power Converter /  / Nathaniel Kalantar / Yuhao Zhou / Haoyuan Xiao" at 3150,870 h60
  text "Dimming Pot" at 5183,796.99 h60

## Silkscreen, mask and mechanical layers (free items; w line width, h text height)
Top Overlay:
  text "GND" at 402,4873 h60
  text "LED+" at 7565,4625 h60
  text "LED-" at 7576,4287 h60
  text "Vin" at 399,4002 h60
  text "-15V" at 4160,2490 h60
  text "GND" at 4220,2220 h60
  text "+15V" at 4150,1950 h60
  text "GND" at 4077,728 h60
  text "5V" at 4110,410 h60